# Altium PCB PCB3.PcbDoc
Units mm, origin at the board's own origin, x right, y up, seen from the top; angles counter-clockwise.
Board outline 100 x 50 mm, 2 copper layers (Top Layer, Bottom Layer); 30 components, 15 nets, 111 pads, 16 vias.
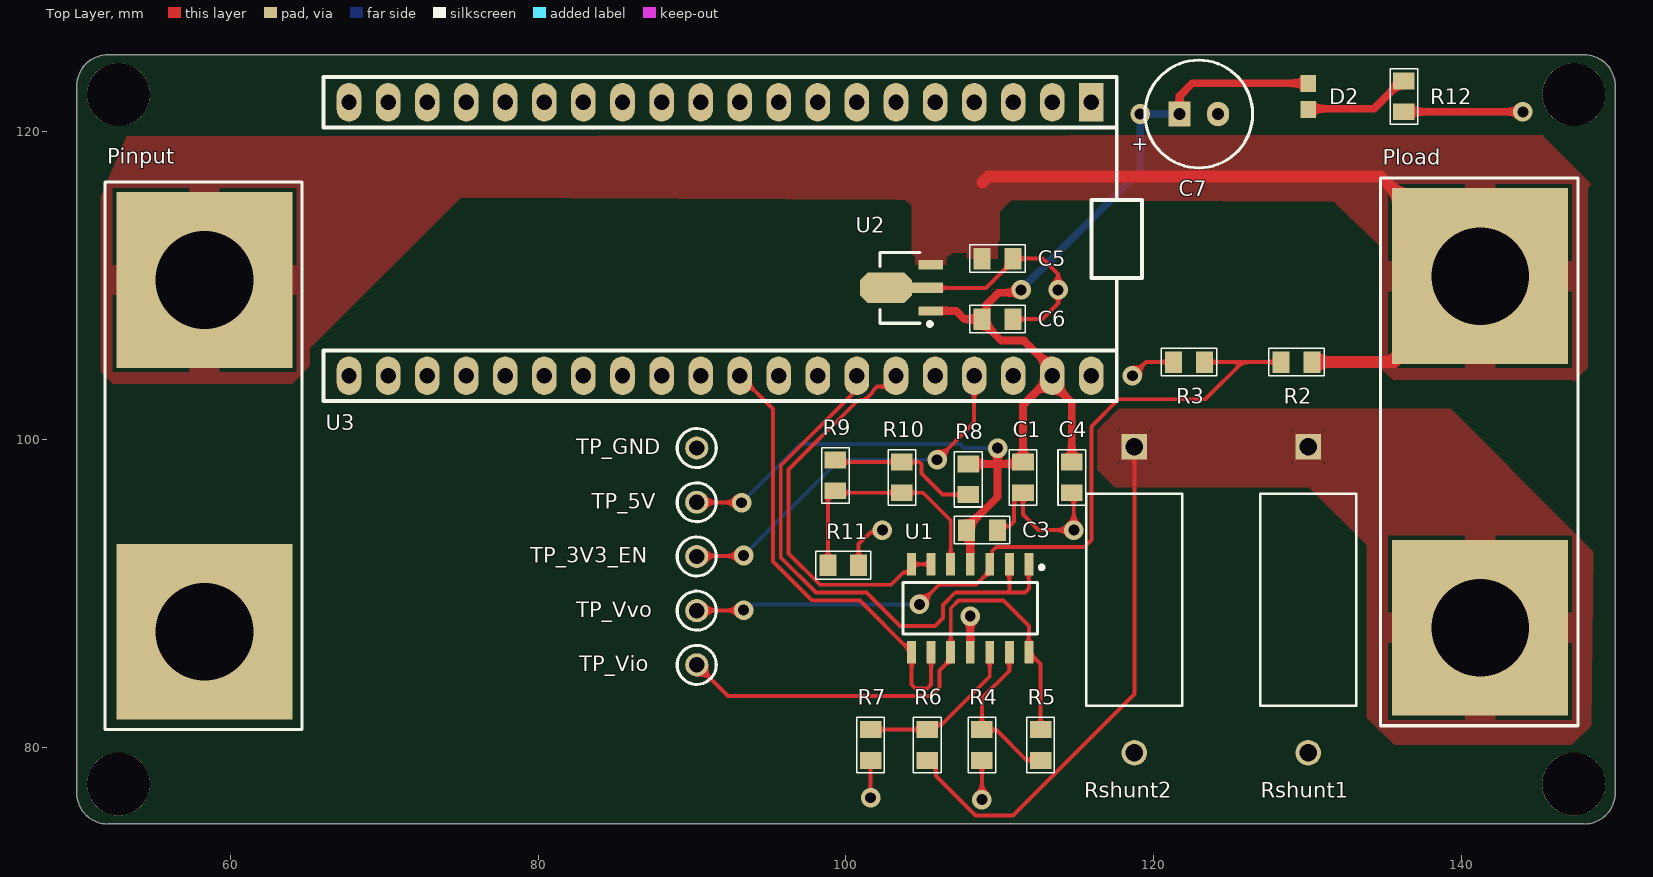
[diagram p0: Top Layer view]
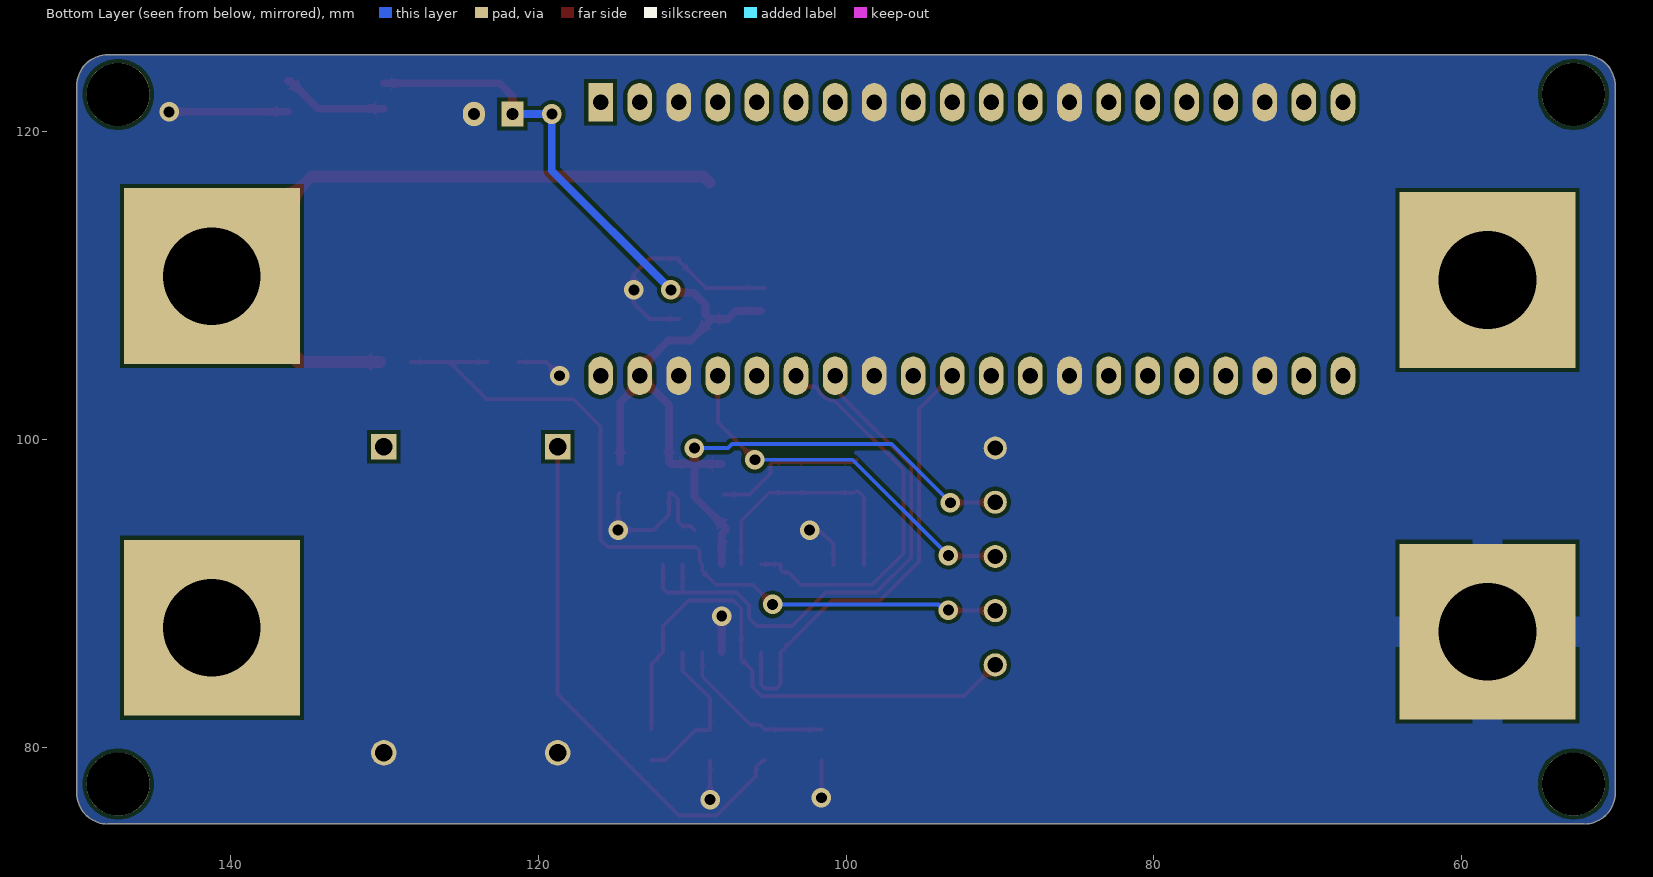
[diagram p1: Bottom Layer view, seen from below]

## Layer stack, top to bottom
Top Solder: solder mask 0.0102, Solder Resist, Dk 3.5
Top Layer: signal copper 0.0356
Dielectric 1: dielectric 0.32, FR-4, Dk 4.8
Bottom Layer: signal copper 0.0356
Bottom Solder: solder mask 0.0102, Solder Resist, Dk 3.5

## Board outline
50,77 50,123 cw(c52,123) 52,125 148,125 cw(c148,123) 150,123 150,77 cw(c148,77) 148,75 52,75 cw(c52,77)

## Design rules (kind name [scope] priority, off if disabled: settings)
Clearance [All] p1: gap=0.254 ignorepadtopadclearanceinfootprint=FALSE
PolygonConnect [All] p1: connectstyle=Relief reliefconductorwidth=2 reliefentries=4 polygonreliefangle="90 Angle" airgapwidth=0.254
RoutingVias [All] p1: holewidth=0.711 width=1.27 viastyle="Through Hole" minholewidth=0.711 minwidth=1.27 maxholewidth=0.711 maxwidth=1.27
SolderMaskExpansion [All] p1: expansion=0.102 istentingtop=FALSE
SupplyNets "Schematic Supply Nets_5" [InNet('VCC')] p1: voltage=0.000
SupplyNets "Schematic Supply Nets_4" [InNet('GND')] p2: voltage=0.000
SupplyNets "Schematic Supply Nets_3" [InNet('Vvo')] p3: voltage=0.000
SupplyNets "Schematic Supply Nets_2" [InNet('Vio')] p4: voltage=0.000
SupplyNets "Schematic Supply Nets_1" [InNet('5V')] p5: voltage=0.000
SupplyNets "Schematic Supply Nets" [InNet('ADC_ref')] p6: voltage=0.000
Width [All] p1: maxlimit=1 minlimit=0.254 preferedwidth=0.254 minimp=50.000000 maximp=50.000000 favimp=50.000000
30 further rules are at their usual default settings.

## Components (designator, comment, footprint, x,y, rotation, side; value= is the part's Value field where it differs from the comment)
C1 "100n" "0805 CAP" 111.506,97.536 r270 top
C3 "100n" "0805 CAP" 108.839,94.107 r0 top
C4 "100n" "0805 CAP" 114.681,97.536 r270 top
C5 "100n" "0805 CAP" 109.855,111.76 r0 top
C6 "1u" "0805 CAP" 109.855,107.823 r0 top
C7 "10u" "CAP-RAD-2.5mm Pitch" 122.936,121.158 r0 top
D2 "LTST-C191KRKT" 0603 130.048,122.301 r90 top
Pinput "Dual Banana Plugs" "Dual Banana Plug" 58.293,98.933 r270 top
Pload "Dual Banana Plugs" "Dual Banana Plug" 141.224,99.187 r270 top
R2 "10k" "0805 RES" 129.286,105.029 r0 top
R3 "1.5k" "0805 RES" 122.301,105.029 r0 top
R4 "1.2k" "0805 RES" 108.839,80.137 r90 top
R5 "10k" "0805 RES" 112.649,80.137 r90 top
R6 "1.2k" "0805 RES" 105.283,80.137 r90 top
R7 "10k" "0805 RES" 101.6,80.137 r90 top
R8 "680" "0805 RES" 107.95,97.409 r90 top
R9 "12k" "0805 RES" 99.314,97.663 r90 top
R10 "12k" "0805 RES" 103.632,97.536 r90 top
R11 "10k" "0805 RES" 99.822,91.821 r180 top
R12 "150" "0805 RES" 136.271,122.301 r90 top
Rshunt1 "ER74R10KT" RES_ER74_TYCO_TYC 130.048,99.53 r270 top
Rshunt2 "ER74R10KT" RES_ER74_TYCO_TYC 118.745,99.53 r270 top
TP_3V3_EN "5003" TP_TH 90.297,92.392 r90 top
TP_5V "5003" TP_TH 90.297,95.917 r90 top
TP_GND "5003" TP_TH 90.297,99.441 r90 top
TP_Vio "5003" TP_TH 90.297,85.344 r90 top
TP_Vvo "5003" TP_TH 90.297,88.868 r90 top
U1 "LM324DR2G" SOIC-14 108.077,89.027 r270 top
U2 "L78L05" SOT-89 103.505,109.855 r180 top
U3 "SC0918" "RP Pico Header V2" 115.951,121.92 r270 top

## Footprints (in the part's own frame and the unit in brackets; to place one, negate y for a bottom-side part, rotate by r counter-clockwise, add the part's x,y. Pads: shape width x height; smd on the part's side, far side on the other; paste and mask are expansions set on the pad)
0603 [mm]
  rect 1.1x1 smd: 1(-0.85,0) 2(0.85,0)
"0805 CAP" [mm] "http://www.digikey.co.nz/Web%20Export/Supplier%20Content/Vishay_8026/PDF/VishayBeyschlag_SolderPad.pdf?redirected=1 with dimension G modified by +0.25mm"
  rect 1.1x1.4 smd: 1(-1,0) 2(1,0)
  silkscreen extent -1.8,-0.9 1.8,0.9, body extent -1.04,-0.66 1.04,0.66, height 0.61
"0805 RES" [mm] "http://www.digikey.co.nz/Web%20Export/Supplier%20Content/Vishay_8026/PDF/VishayBeyschlag_SolderPad.pdf?redirected=1 with dimension G modified by +0.25mm"
  rect 1.1x1.4 smd: 1(-1,0) 2(1,0)
  silkscreen extent -1.8,-0.9 1.8,0.9, body extent -1.04,-0.66 1.04,0.66, height 0.61
"CAP-RAD-2.5mm Pitch" [mm] "Cap 6.3 X 11.2"
  rect 1.45x1.6 hole 0.8: 1(-1.25,0)
  oval 1.45x1.6 hole 0.8: 2(1.25,0)
  silkscreen extent -3.5,-3.5 3.5,3.5, body extent -3.15,-3.15 3.15,3.15, height 11.5
"Dual Banana Plug" [mm] "Connector; 2 Position"
  rect 11.43x11.43 hole 6.35: 1(-11.43,0) 2(11.43,0)
  silkscreen extent -17.8,-6.48 17.8,6.35, body extent -17.38,-5.99 17.43,5.99, height 5.5
RES_ER74_TYCO_TYC [mil]
  rect 65x65 / inner round 60 / far side rect 65x65 hole 45 paste-99999 mask+0: 1(0,0)
  round 65 / inner round 60 / far side round 65 hole 45 paste-99999 mask+0: 2(783.5,0)
  silkscreen extent 121,-123 663,123, body extent -17,-118 801,118, height 236
"RP Pico Header V2" [mm]
  rect 2.5x1.6 hole 1: 1(0,0)
  oval 2.5x1.6 hole 1: 2(0,-2.54) 3(0,-5.08) 4(0,-7.62) 5(0,-10.16) 6(0,-12.7) 7(0,-15.24) 8(0,-17.78) 9(0,-20.32) 10(0,-22.86) 11(0,-25.4) 12(0,-27.94) 13(0,-30.48) 14(0,-33.02) 15(0,-35.56) 16(0,-38.1) 17(0,-40.64) 18(0,-43.18) 19(0,-45.72) 20(0,-48.26) 21(17.78,-48.26) 22(17.78,-45.72) 23(17.78,-43.18) 24(17.78,-40.64) 25(17.78,-38.1) 26(17.78,-35.56) 27(17.78,-33.02) 28(17.78,-30.48) 29(17.78,-27.94) 30(17.78,-25.4) 31(17.78,-22.86) 32(17.78,-20.32) 33(17.78,-17.78) 34(17.78,-15.24) 35(17.78,-12.7) 36(17.78,-10.16) 37(17.78,-7.62) 38(17.78,-5.08) 39(17.78,-2.54) 40(17.78,0)
  silkscreen extent -1.65,-49.91 19.43,3.3, body extent -1.61,-49.66 19.39,2.67, height 12.6
SOIC-14 [mm] "SOIC, 14-Leads, Body 8.75x4mm, Pitch 1.27mm"
  rect 1.48x0.58 smd: 1(-2.86,3.81) 2(-2.86,2.54) 3(-2.86,1.27) 4(-2.86,0) 5(-2.86,-1.27) 6(-2.86,-2.54) 7(-2.86,-3.81) 8(2.86,-3.81) 9(2.86,-2.54) 10(2.86,-1.27) 11(2.86,0) 12(2.86,1.27) 13(2.86,2.54) 14(2.86,3.81)
  silkscreen extent -2.78,-4.38 1.67,4.78, body extent -3.1,-4.38 3.1,4.37, height 1.75
SOT-89 [mm] "SOT89, 3-Leads, Body 4.5x2.4 mm, Pitch 1.5mm, Lead Span 4.1mm, IPC Low Density"
  rect 1.6x0.6 smd: 1(-2,1.5) 3(-2,-1.5)
  rect 2x0.7 smd: 2(-1.8,0)
  oct 3.4x2 smd: 2(0.9,0)
  silkscreen extent -2.08,-2.3 1.3,2.47, body extent -2.25,-2.29 2,2.29, height 1.6
TP_TH [mm] "Test Point, Through Hole, Dia 2.54mm"
  round 1.5 hole 1: 1(0,0)
  silkscreen extent -1.27,-1.27 1.27,1.27, body extent -1.27,-1.27 1.27,1.27, height 4.57

## Part data
C1 C3 C4 C5 C6: library part CerCap_SMT_0805, "SMT ceramic capacitor 0805 size"
C7: library part ElecCap_TH_2P0, "Electrolytic capacitor with radial package, 2mm pitch and 5.2mm diameter", LatestRevisionDate=17-Jul-2002, LatestRevisionNote="Re-released for DXP Platform.", PackageDescription="Polarized Capacitor; 2 Leads", PackageReference=POLAR0.8, Published=8-Jun-2000, Publisher="Altium Limited"
D2: "http://octopart.com/ltst-c190krkt-lite-on-549893", Package=None, Availability=Unavailable, MP=LTST-C191KRKT, Price=None
Pinput Pload: library part AC_Output, "Dual banana plugs connection to the AC load", LatestRevisionDate=17-Jul-2002, LatestRevisionNote="Re-released for DXP Platform.", Publisher="Altium Limited"
R2 R3 R4 R5 R6 R7 R8 R9 R10 R11 R12: library part Res_SMT_0805, "0805 resistor", ComponentLink1Description=https://nz.mouser.com/datasheet/2/315/AOA0000C304-1149620.pdf, LatestRevisionDate=17-Jul-2002, LatestRevisionNote="Re-released for DXP Platform.", PackageReference=AXIAL-0.4, Published=8-Jun-2000, Publisher="Altium Limited"
Rshunt1 Rshunt2: "No Description Available", Mfr_Name="TE Connectivity", Digi-Key_Part_Number_1=A105885CT-ND, Digi-Key_Part_Number_2=A105885TB-ND
TP_3V3_EN TP_5V TP_GND TP_Vio TP_Vvo: library part TestPoint, "Test Point, Orange, 1-Pin THD, RoHS", Forward Current="3 A", Forward Voltage="1.08 V", Max Operating Temperature="150 degC", Max Surge Current="80 A", Min Operating Temperature="-65 degC", Package Quantity=500, Peak Reverse Current="600 uA", ComponentLink1Description="Manufacturer URL", ComponentLink1URL=http://www.keyelco.com/, ComponentLink2Description=Datasheet, ComponentLink2URL=http://keyelco.com/userAssets/file/M65p56.pdf, DatasheetVersion=Jun-15, Diameter="5.3 mm", Height="0.25 inch", Length="9.5 mm", Mount="Through Hole", PackageDescription="1-Pin Through Hole Device, Dia 2.54 mm", PackageReference=5003, Packaging=Bulk, Pins=2, Radiation Hardening=No, REACH SVHC="No SVHC", RoHSCompliant=true, Weight="0.01 lb", Width="0.25 inch"
U1: library part LM324DR_SMT_SOIC16, "Single Supply Quad Operational Amplifier, 3 to 32 V, 0 to 70 degC, 14-Pin SOIC, Pb-Free, Tape and Reel", Manufacturer="On Semiconductor", ComponentLink1Description="Manufacturer URL", ComponentLink1URL=http://www.onsemi.com/, ComponentLink2Description=Datasheet, ComponentLink2URL=http://www.onsemi.cn/pub_link/Collateral/LM324-D.PDF, ComponentLink3Description="Package Specification", ComponentLink3URL=http://www.onsemi.com/pub_link/Collateral/751A-03.PDF, DatasheetVersion="Rev. 25", Mounting Technology="Surface Mount", PackageDescription="14-Pin Small Outline Integrated Circuit, Body 8.65 x 3.9 mm, Pitch 1.27 mm", PackageReference=SOIC-14-751A-03, PackageVersion="Rev. K, 05/2011", Packing="Tape and Reel", PartNumber=LM324DR2G, RoHS=TRUE, VCC Max (V)=32, VCC Min (V)=3
U2: library part L78L05_SMT_SOT89, "LDO Voltage Regulator 5V", Supplier Part Number 1=497-1181-1-ND, ComponentLink1Description=http://www.st.com/content/ccc/resource/technical/document/datasheet/99/3b/7d/91/91/51/4b/be/CD00000544.pdf/files/CD00000544.pdf/jcr:content/translations/en.CD00000544.pdf, ComponentLink1URL=http://www.st.com/content/ccc/resource/technical/document/datasheet/99/3b/7d/91/91/51/4b/be/CD00000544.pdf/files/CD00000544.pdf/jcr:content/translations/en.CD00000544.pdf, Supplier 1=Digi-Key
U3: "RP2040 Raspberry Pi Pico - ARMÂ® CortexÂ®-M0+ MCU 32-Bit Embedded Evaluation Board", Package=None, Availability="In Stock", Check_prices=https://www.snapeda.com/parts/SC0918/Raspberry+Pi/view-part/?ref=eda, MF="Raspberry Pi", MP=SC0918, Price=None, Purchase-URL=https://pricing.snapeda.com/search/part/SC0918/?ref=eda, SnapEDA_Link=https://www.snapeda.com/parts/SC0918/Raspberry+Pi/view-part/?ref=snap

## Free pads (board coordinates)
  round 4.1 hole 4.1: 1(52.705,122.428) 2(147.32,122.428) 3(147.32,77.597) 4(52.705,77.597)

## Via types
v1: diameter 1.27, hole 0.711, Top Layer to Bottom Layer, 16 vias

## Nets (pads, with @x,y where several pads share a name; then routed paths per layer and width w, separated by ;. In a path a pad name is that pad's centre, name@x,y a point inside that pad or via, vN(x,y) a via of type N, cw(c..) or ccw(c..) an arc to the next point about the centre after c; other vN are vias at no path point)
5V: C1.1 C3.1 C4.1 C6.1 C7.1 D2.2 R8.2 TP_5V.1 U1.4 U2.1 U3.39 | length 86.2
  Top Layer w0.254: TP_5V.1 90.313,95.901 93.202,95.901 v1(93.218,95.885)
  Top Layer w0.508: U2.1 107.164,108.355 107.696,107.823 C6.1 ; U1.4 108.077,93.869 C3.1 107.839,94.257 109.855,96.273 109.855,98.26 ; R8.2@108.1,98.409 109.706,98.409 ; v1(109.855,99.441) 109.855,98.409 ; v1(111.379,109.728) 111.185,109.534 109.915,109.534 109.136,108.755 109.136,108.104 C6.1 ; U3.39@113.411,104.59 111.575,106.426 110.102,106.426 108.855,107.673 C6.1 ; C4.1 114.681,102.42 113.411,103.69 U3.39 111.506,102.235 C1.1 111.379,98.409 109.855,98.409 ; C7.1 121.686,122.321 122.516,123.151 D2.2 ; 109.706,98.409 109.855,98.409 ; 109.706,98.409 109.855,98.26 ; 109.855,98.26 109.855,98.409
  Bottom Layer w0.254: v1(93.218,95.885) 97.028,99.695 107.412,99.695 107.666,99.441 v1(109.855,99.441)
  Bottom Layer w0.508: v1(111.379,109.728) 119.126,117.475 v1(119.126,121.158) C7.1
ADC_ref: R9.1 R10.1 R11.2 U1.5 | length 16.2
  Top Layer w0.254: R11.2 98.822,96.24 99.245,96.663 R9.1 99.441,96.536 R10.1 105.013,96.536 106.807,94.742 U1.5
ADC_ref_buff: U1.6 U1.7 U3.35 | length 25.9
  Top Layer w0.254: U3.35 103.251,104.054 102.629,103.432 102.012,103.432 101.864,103.284 101.686,103.024 cw(c100.711,103.69) 100.731,102.509 96.266,98.044 96.266,92.588 98.303,90.551 102.931,90.551 103.745,91.365 104.104,91.365 104.267,91.528 U1.7 U1.6
GND: C1.2 C3.2 C4.2 C5.2 C6.2 C7.2 Pinput.2 R3.1 R4.1 R7.1 R11.1 R12.1 Rshunt1.2 Rshunt2.2 TP_GND.1 U1.11 U2.2 U3.3 U3.8 U3.13 U3.18 U3.23 U3.28 U3.33 U3.38 | length 47.6
  Top Layer w0.254: R11.1 100.822,93.202 101.58,93.96 102.215,93.96 v1(102.362,94.107) ; v1(101.6,76.708) R7.1 ; U2.2@105.305,109.855 109.1,109.855 110.855,111.61 C5.2 112.776,111.76 113.792,110.744 v1(113.792,109.728) 113.792,108.839 112.776,107.823 C6.2 ; v1(108.839,76.581) R4.1 ; C3.2 110.097,94.365 110.621,94.365 110.933,94.677 110.933,96.113 111.356,96.536 C1.2 111.506,95.123 112.522,94.107 v1(114.808,94.107) 114.808,96.409 C4.2 ; v1(118.618,104.14) 119.507,105.029 R3.1
  Top Layer w0.508: U1.11 v1(108.077,88.519) ; R12.1 v1(144.002,121.301) v1@144.018,121.285
NetD2_1: D2.1 R12.2 | length 7
  Top Layer w0.508: D2.1@130.048,121.501 134.321,121.501 136.121,123.301 R12.2
NetR4_2: R4.2 R5.1 U1.13 | length 10.4
  Top Layer w0.254: U1.13 110.617,84.963 108.839,83.185 R4.2 108.866,81.11 109.771,81.11 111.717,79.164 112.622,79.164 R5.1
NetR6_2: R6.2 R7.2 U1.12 | length 10.8
  Top Layer w0.254: R7.2 R6.2 105.596,81.45 106.215,81.45 109.347,84.582 U1.12
NetR8_1: R8.1 R9.2 R10.2 | length 9.9
  Top Layer w0.254: R9.2 99.441,98.536 R10.2 104.753,98.536 104.902,98.387 104.902,97.79 106.283,96.409 R8.1
NetTP_3V3_EN_1: TP_3V3_EN.1 U3.37 | length 24.7
  Top Layer w0.254: TP_3V3_EN.1 90.329,92.424 93.313,92.424 v1(93.345,92.456) ; v1(105.918,98.679) 108.331,101.092 U3.37
  Bottom Layer w0.254: v1(93.345,92.456) 99.568,98.679 v1(105.918,98.679)
VCC: C5.1 Pinput.1 Pload.1 R2.2 U2.3 | length 48.5
  Top Layer w0.762: 108.855,116.697 109.252,117.094 134.747,117.094 Pload.1 135.636,105.029 R2.2
Vio: R5.2 TP_Vio.1 U1.10 U1.14 | length 35.3
  Top Layer w0.254: TP_Vio.1 92.329,83.312 105.493,83.312 106.069,83.887 106.069,84.979 106.807,85.717 U1.10 106.807,89.027 107.315,89.535 110.236,89.535 111.887,87.884 U1.14 112.649,85.405 R5.2
Vio_buff: U1.8 U1.9 U3.31 | length 30.1
  Top Layer w0.254: U3.31 95.25,101.981 95.25,92.075 97.79,89.535 100.899,89.535 U1.8 104.267,84.074 104.521,83.82 105.283,83.82 105.537,84.074 U1.9
Vis: Pload.2 R6.1 Rshunt1.1 Rshunt2.1 | length 34.6
  Top Layer w0.254: R6.1 105.433,79.137 105.856,78.714 105.856,78.127 108.418,75.565 110.866,75.565 118.745,83.444 Rshunt2.1
Vvo: R2.1 R3.2 TP_Vvo.1 U1.3 | length 52.2
  Top Layer w0.254: TP_Vvo.1 90.313,88.884 93.329,88.884 v1(93.345,88.9) ; v1(104.775,89.281) 106.045,90.551 108.461,90.551 109.347,91.437 U1.3 109.51,92.05 109.51,92.746 109.772,93.008 115.487,93.008 115.951,93.472 115.951,100.838 117.729,102.616 123.38,102.616 125.793,105.029 ; R3.2 125.793,105.029 ; R2.1 125.793,105.029
  Bottom Layer w0.254: v1(93.345,88.9) 93.62,88.9 94.001,89.281 v1(104.775,89.281)
Vvo_buff: U1.1 U1.2 U3.34 | length 36.8
  Top Layer w0.254: U3.34 100.711,103.326 100.349,102.964 100.349,102.889 95.758,98.298 95.758,92.329 98.044,90.043 101.346,90.043 103.505,87.884 105.791,87.884 106.299,88.392 106.299,89.237 107.105,90.043 110.468,90.043 ; U1.2 110.617,90.192 110.468,90.043 ; U1.1 111.887,90.297 111.633,90.043 110.468,90.043
pads on no net: U3.1 U3.2 U3.4 U3.5 U3.6 U3.7 U3.9 U3.10 U3.11 U3.12 U3.14 U3.15 U3.16 U3.17 U3.19 U3.20 U3.21 U3.22 U3.24 U3.25 U3.26 U3.27 U3.29 U3.30 U3.32 U3.36 U3.40

## Polygon pours and split planes (outlines as drawn)
VCC on Top Layer "VCC_L01_P006" (solid, pour order 6): 109.474,112.395 109.855,112.776 109.982,112.776 109.982,114.808 110.998,115.824 103.632,115.824 104.267,115.189 104.267,111.887 104.775,111.379 106.172,111.379 106.934,112.141 108.077,112.141 108.331,112.395 109.347,112.395
VCC on Top Layer "VCC_L01_P003" (solid, pour order 3): 134.735,105.791 134.577,104.746 135.566,103.886 147.193,103.886 147.32,103.759 148.209,104.648 148.209,116.332 148.463,116.586 145.228,119.821 53.24,119.698 51.562,115.782 51.562,104.394 52.324,103.632 64.008,103.632 65.151,104.775 65.151,105.918 74.943,115.71 131.84,115.443 131.699,115.443 134.69,112.592
Vis on Top Layer "VIS_L01_P002" (solid, pour order 2): 148.448,81.392 147.193,80.137 135.636,80.137 133.858,81.915 133.858,93.142 130.099,96.901 117.475,96.901 116.332,98.044 116.332,100.584 117.729,101.981 139.319,101.981 147.066,94.234 148.59,92.71 148.59,92.583
GND on Bottom Layer "GND_L02_P000" (solid, pour order 0): 50,77 50,123 cw(c52,123) 52,125 148,125 cw(c148,123) 150,123 150,77 cw(c148,77) 148,75 52,75 cw(c52,77)

## Silkscreen, mask and mechanical layers (free items; w line width, h text height)
Board Outline:
  the board outline again, w0.254

## Text inside footprints (layer, text, board x,y; h text height)
C7: Top Overlay "+" at 118.536,118.758 h1